# Altium PCB arduino-nano_v2.PcbDoc
Units mm, origin at the board's own origin, x right, y up, seen from the top; angles counter-clockwise.
Board outline 18.29 x 45.21 mm, 4 copper layers (Top Layer, Signal Layer Top, Signal Layer Bottom, Bottom Layer), stack 0.603 mm thick; 25 components, 41 nets, 165 pads, 12 vias.
Unrouted connection lines stored in the file: 70.
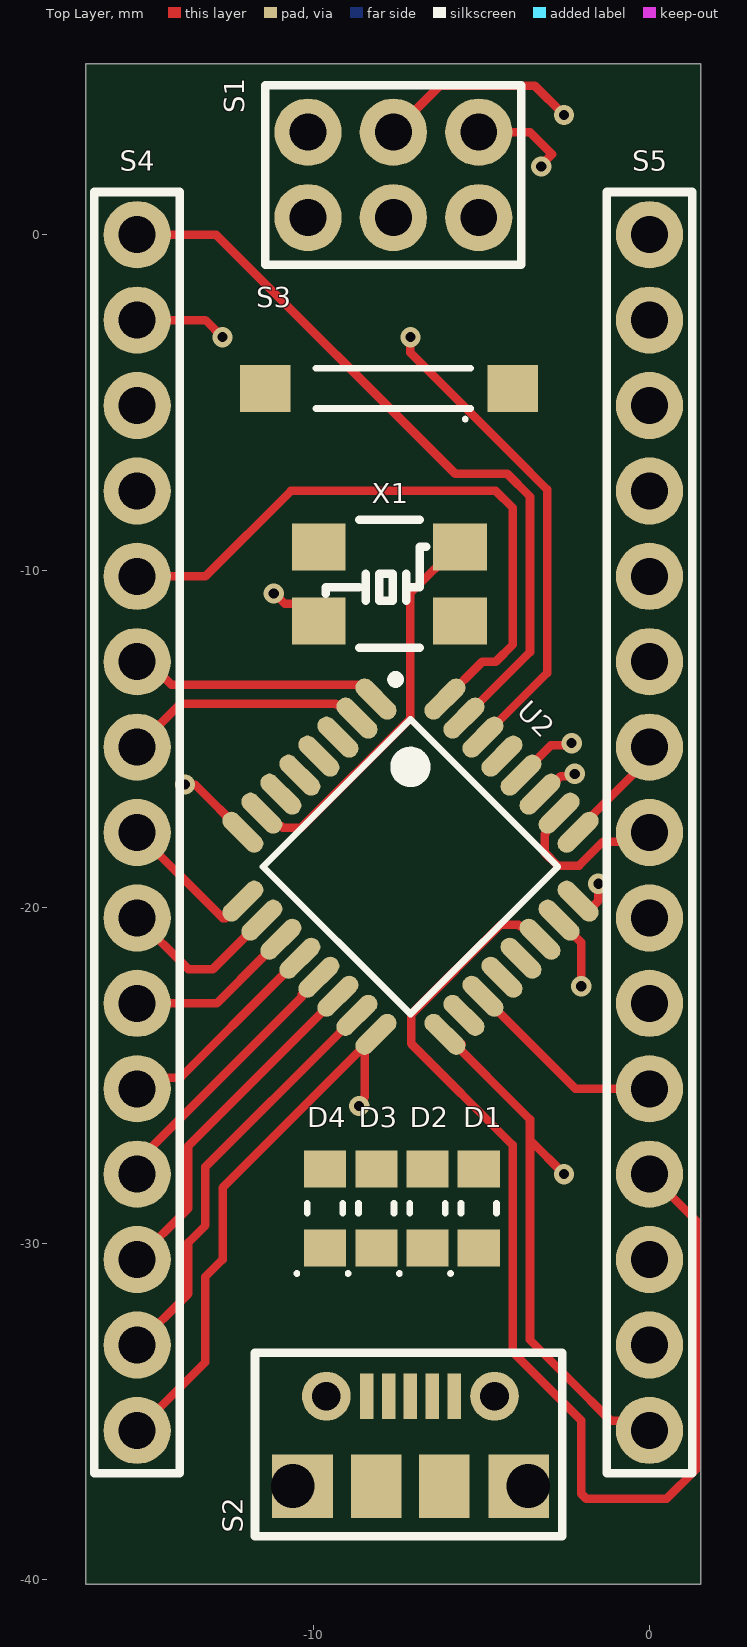
[diagram p0: Top Layer view]
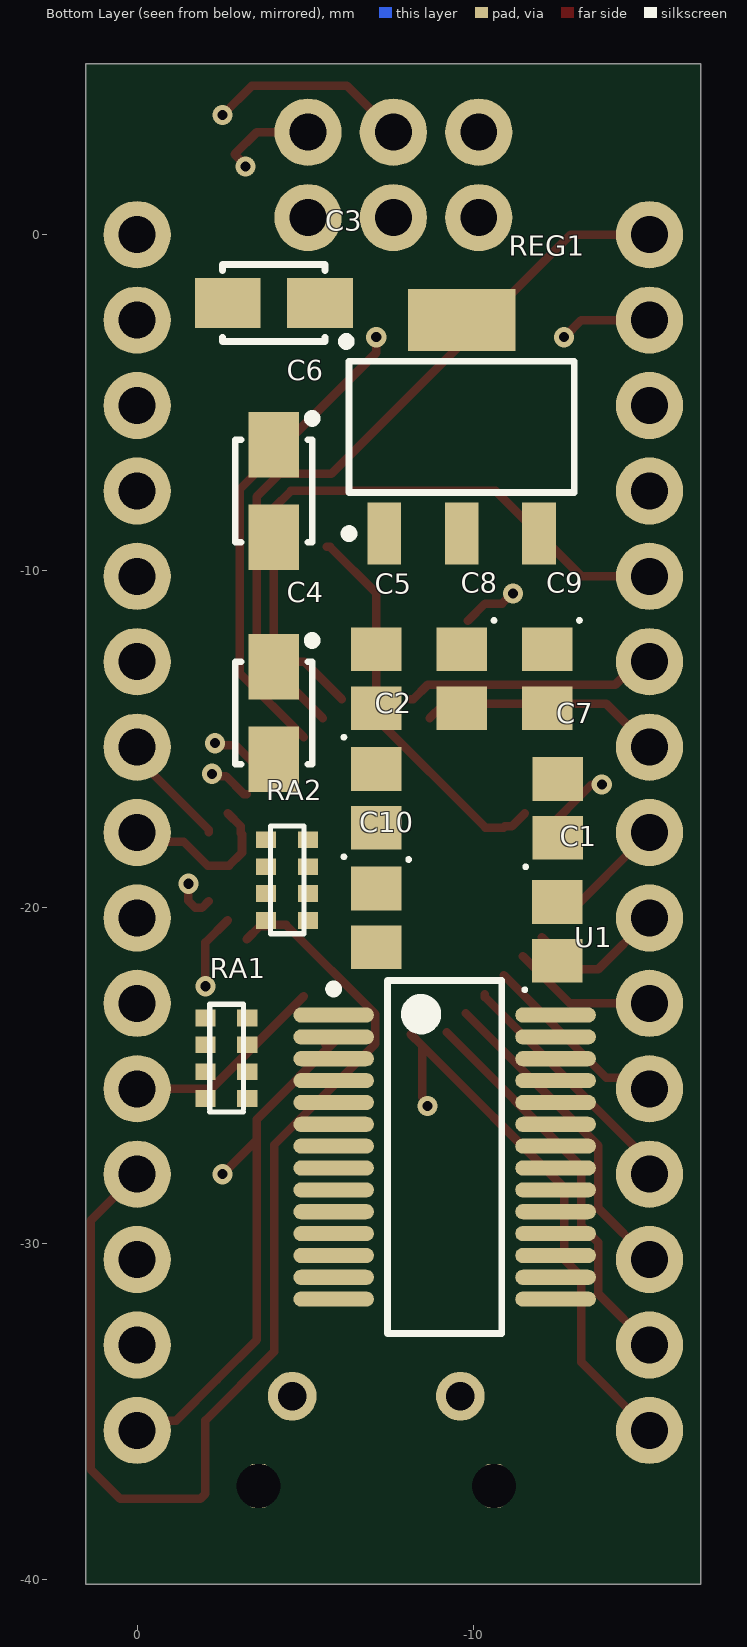
[diagram p1: Bottom Layer view, seen from below]
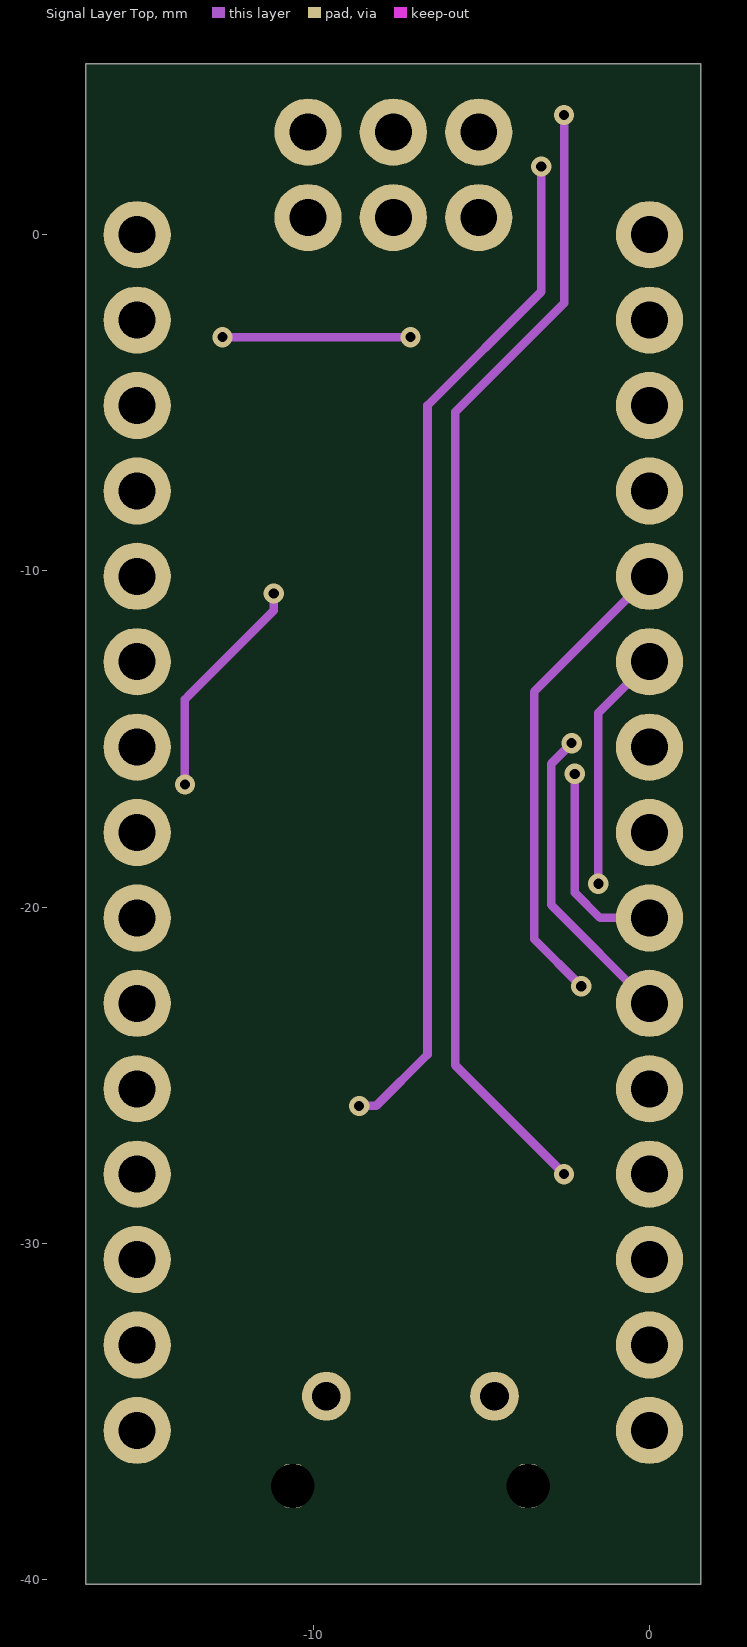
[diagram p2: Signal Layer Top]

## Layer stack, top to bottom
Top Solder: solder mask 0.0102, Solder Resist, Dk 3.5
Top Layer: signal copper 0.0356
Dielectric 2: prepreg 0.0711, PP-006, Dk 4.1
Signal Layer Top: signal copper 0.035
Dielectric 1: dielectric 0.32, FR-4, Dk 4.8
Signal Layer Bottom: signal copper 0.035
Dielectric 3: prepreg 0.0711, PP-006, Dk 4.1
Bottom Layer: signal copper 0.0356
Bottom Solder: solder mask 0.0102, Solder Resist, Dk 3.5

## Board outline
-16.764,-40.132 1.524,-40.132 1.524,5.08 -16.764,5.08

## Design rules (kind name [scope] priority, off if disabled: settings)
Clearance [All] p1: gap=0.254 ignorepadtopadclearanceinfootprint=FALSE except(0: Arc-Hole Track-Hole SMDPad-Hole THPad-Hole Via-Hole Fill-Hole Poly-Hole Region-Hole Text-Hole)
PolygonConnect [All] p1: connectstyle=Relief reliefconductorwidth=0.254 reliefentries=4 polygonreliefangle="90 Angle" airgapwidth=0.254
RoomDefinition arduino-nano [InComponentClass('arduino-nano')] p1: confinementstyle=ConfineIn formatcopy=TRUE lockcomponents=FALSE outline -141.224,-66.04 -90.424,-66.04 -90.424,-40.64 -141.224,-40.64
RoutingVias [All] p1: holewidth=0.3 width=0.3 viastyle="Through Hole" minholewidth=0.3 minwidth=0.6 maxholewidth=0.5 maxwidth=1
SolderMaskExpansion [All] p1: expansion=0.102 istentingtop=FALSE
Width [All] p1: maxlimit=0.254 minlimit=0.254 preferedwidth=0.254
30 further rules are at their usual default settings.

## Components (designator, comment, footprint, x,y, rotation, side; value= is the part's Value field where it differs from the comment)
C1 "100nF Ceramic Multilayer Capacitor_1" CAPCP2012X09N -12.493,-20.718 r90 bottom
C2 "100nF Ceramic Multilayer Capacitor_1" CAPCP2012X09N -7.112,-16.764 r90 bottom
C3 "Capacitor SMT Tantalum" "CASE A - 3216X18" -4.064,-2.032 r0 bottom value=4.7µF
C4 "Capacitor SMT Tantalum" "CASE A - 3216X18" -4.064,-14.224 r270 bottom value=4.7µF
C5 "100nF Ceramic Multilayer Capacitor_1" CAPCP2012X09N -7.112,-13.208 r90 bottom
C6 "Capacitor SMT Tantalum" "CASE A - 3216X18" -4.064,-7.62 r270 bottom value=4.7µF
C7 "100nF Ceramic Multilayer Capacitor_1" CAPCP2012X09N -12.516,-17.063 r90 bottom
C8 "100nF Ceramic Multilayer Capacitor_1" CAPCP2012X09N -9.652,-13.208 r270 bottom
C9 "C0805C180J5GACTU" CAPCP2012X09N -12.192,-13.208 r270 bottom
C10 "C0805C180J5GACTU" CAPCP2012X09N -7.112,-20.32 r270 bottom
D1 "Kingbright Green LED, 70 mcd 120 ° 0805" LED1913X12NGREEN -5.08,-28.956 r90 top
D2 "Kingbright Red LED, 100 mcd 120 ° 0805" LED1913X12NRED -6.604,-28.956 r90 top
D3 "Kingbright Blue LED, 60 mcd 120 ° 0805" LED1913X12NBLUE -8.128,-28.956 r90 top
D4 "Kingbright Orange LED, 200 mcd 120 ° 0805" LED1913X12NYEL/ORANGE -9.652,-28.956 r90 top
RA1 "1k +- 5% SMT Resistor Array" "1206 RA" -3.15,-23.292 r270 bottom
RA2 "1k +- 5% SMT Resistor Array" "1206 RA" -4.953,-17.996 r270 bottom
REG1 "LM1117MP-5.0/NOPB, Low Dropout Voltage Regulator, 1.5A, 5 V ±1%, 4-Pin SOT-223" SOT230P700X180-4N -9.652,-5.715 r90 bottom
S1 "Programming Headers Dual Row" "ISP HEADER" 12.573,-11.049 r180 top
S2 "NewMolex Right Angle SMT Female Type B Micro USB Connector, 30 V ac, 1.8A" MicroUSB -8.342,-34.544 r0 top
S3 "Tactile Switch SPST- NO 0.05A @24V" Button8014X17N -7.62,-4.572 r180 top
S4 "connector;str header;single row;.1 cont centers;.095 tail;gold or gtx;36 contact" Header -15.24,0 r270 top
S5 "connector;str header;single row;.1 cont centers;.095 tail;gold or gtx;36 contact" Header 0,0 r270 top
U1 "FT232RL, Universal Asynchronous Receiver & Transmitter 3MBd, 28-Pin, SSOP" SOP65P780X200-28N -9.144,-27.432 r180 bottom
U2 "ATMEGA328P-AU" TQFP80P900X900X120-32N -7.112,-18.796 r315 top
X1 "Aker 16MHz Crystal SMT" "Aker S5C Crystal" -5.636,-9.284 r0 top value=16MHz

## Footprints (in the part's own frame and the unit in brackets; to place one, negate y for a bottom-side part, rotate by r counter-clockwise, add the part's x,y. Pads: shape width x height; smd on the part's side, far side on the other; paste and mask are expansions set on the pad)
"1206 RA" [mm]
  rect 0.5x0.6 smd: 1(0,0.127) 2(0.8,0.127) 3(1.6,0.127) 4(2.4,0.127) 5(0,-1.118) 6(0.8,-1.118) 7(1.6,-1.118) 8(2.4,-1.118)
  silkscreen extent -0.41,-0.99 2.79,0.01, body extent -0.41,-1.31 2.79,0.29, height 0.5
"Aker S5C Crystal" [mm]
  rect 1.6x1.4 smd: 1(0,0) 2(-4.2,0) 3(0,-2.2) 4(-4.2,-2.2)
  round 0.254 on Top Overlay: 5(-3,-2.4)
  silkscreen extent -4,-3 -1,0.8, body extent -4.7,-2.8 0.5,0.6, height 1
Button8014X17N [mm] "Chip Inductor, 2-Leads, Body 8.00x1.40mm, IPC Medium Density"
  rect 1.5x1.4 smd: 1(-3.556,0) 2(3.81,0)
  silkscreen extent -2.3,-0.6 2.3,0.96, body extent -3.79,-1.92 4.21,1.78, height 2.5
CAPCP2012X09N [mm] "Chip Capacitor, 2-Leads, Body 2.00x1.25mm, IPC Medium Density"
  rect 1.3x1.5 smd: 1(-0.875,0) 2(0.875,0)
  silkscreen extent -1.79,0.91 -1.69,1.01, body extent -1.05,-0.57 0.95,0.68, height 0.78
"CASE A - 3216X18" [mm] "Molded Capacitor, 2-Leads, Body 3.2x1.6mm, IPC Medium Density"
  rect 1.95x1.5 smd: 1(-1.375,0) 2(1.375,0)
  silkscreen extent -2.28,-1.14 1.52,1.27, body extent -1.52,-0.76 1.65,0.84, height 1.77
Header [mm] "SIL Header"
  round 2 hole 1.1: 1(0,0) 2(2.54,0) 3(5.08,0) 4(7.62,0) 5(10.16,0) 6(12.7,0) 7(15.24,0) 8(17.78,0) 9(20.32,0) 10(22.86,0) 11(25.4,0) 12(27.94,0) 13(30.48,0) 14(33.02,0) 15(35.56,0)
  silkscreen extent -1.27,-1.27 36.83,1.27, body extent -1.33,-1.35 36.93,1.35, height 8.6
"ISP HEADER" [mm] "SIL Header for programming"
  round 2 hole 1.1: 1(17.653,-14.097) 2(17.653,-11.557) 3(20.193,-14.097) 4(20.193,-11.557) 5(22.733,-14.097) 6(22.733,-11.557)
  silkscreen extent 16.38,-15.49 24,-10.16, body extent 16.38,-15.37 24,-10.29, height 8
LED1913X12NBLUE [mm] "LED 2-Leads, Body 1.90x1.32mm, IPC Medium Density"
  rect 1.1x1.25 smd: 1(-1.175,0) 2(1.175,0)
  silkscreen extent -1.99,-0.53 0.15,0.89, body extent -1,-0.62 1.02,0.62, height 1.1
LED1913X12NGREEN [mm] "LED 2-Leads, Body 1.90x1.32mm, IPC Medium Density"
  rect 1.1x1.25 smd: 1(-1.175,0) 2(1.175,0)
  silkscreen extent -1.99,-0.53 0.15,0.89, body extent -1.01,-0.62 1.01,0.63, height 1.1
LED1913X12NRED [mm] "LED 2-Leads, Body 1.90x1.32mm, IPC Medium Density"
  rect 1.1x1.25 smd: 1(-1.175,0) 2(1.175,0)
  silkscreen extent -1.99,-0.53 0.15,0.89, body extent -1.02,-0.43 1.04,0.47, height 0.85
LED1913X12NYEL/ORANGE [mm] "LED 2-Leads, Body 1.90x1.32mm, IPC Medium Density"
  rect 1.1x1.25 smd: 1(-1.175,0) 2(1.175,0)
  silkscreen extent -1.99,-0.53 0.15,0.89, body extent -1.01,-0.62 1.01,0.63, height 1.1
MicroUSB [mm] "MicroUSB  Molex 5Pin"
  rect 0.4x1.35 smd: 1(-0.07,0) 2(0.58,0) 3(1.23,0) 4(1.88,0) 5(2.53,0)
  rrect50% 0.6x1.3 hole 1.3: ""(-2.27,-2.667) ""(-2.27,-2.667) ""(4.73,-2.667)
  rect 1.8x1.9 smd: ""(-1.98,-2.678) ""(4.45,-2.678)
  round 1.45 hole 0.85: ""(-1.27,0) ""(3.73,0)
  rect 1.5x1.9 smd: ""(0.218,-2.678) ""(2.242,-2.678)
  silkscreen extent -3.39,-4.17 5.75,1.3, body extent -2.83,-5.32 5.37,0.11, height 2.68
SOP65P780X200-28N [mm] "SOP, 28-Leads, Body 10.20x5.30mm, Pitch 0.65mm, IPC Medium Density"
  oval 2.4x0.45 smd: 1(-3.3,4.225) 2(-3.3,3.575) 3(-3.3,2.925) 4(-3.3,2.275) 5(-3.3,1.625) 6(-3.3,0.975) 7(-3.3,0.325) 8(-3.3,-0.325) 9(-3.3,-0.975) 10(-3.3,-1.625) 11(-3.3,-2.275) 12(-3.3,-2.925) 13(-3.3,-3.575) 14(-3.3,-4.225) 15(3.3,-4.225) 16(3.3,-3.575) 17(3.3,-2.925) 18(3.3,-2.275) 19(3.3,-1.625) 20(3.3,-0.975) 21(3.3,-0.325) 22(3.3,0.325) 23(3.3,0.975) 24(3.3,1.625) 25(3.3,2.275) 26(3.3,2.925) 27(3.3,3.575) 28(3.3,4.225)
  silkscreen extent -3.43,-5.25 1.7,5.25, body extent -3.91,-5.1 3.91,5.1, height 2
SOT230P700X180-4N [mm] "SOT223, 4-Leads, Body 6.50x7.00mm (avg), Pitch 2.30mm, IPC Medium Density"
  rect 1.85x1 smd: 1(-3.175,2.3) 2(-3.175,0) 3(-3.175,-2.3)
  rect 1.85x3.2 smd: 4(3.175,0)
  silkscreen extent -3.3,-3.35 1.95,3.48, body extent -3.8,-3.12 3.29,3.38, height 1.65
TQFP80P900X900X120-32N [mm] "TQFP, 32-Leads, Body 7.00x7.00mm, Pitch 0.80mm, IPC Medium Density"
  oval 1.5x0.55 smd: 1(-4.25,2.8) 2(-4.25,2) 3(-4.25,1.2) 4(-4.25,0.4) 5(-4.25,-0.4) 6(-4.25,-1.2) 7(-4.25,-2) 8(-4.25,-2.8) 17(4.25,-2.8) 18(4.25,-2) 19(4.25,-1.2) 20(4.25,-0.4) 21(4.25,0.4) 22(4.25,1.2) 23(4.25,2) 24(4.25,2.8)
  oval 0.55x1.5 smd: 9(-2.8,-4.25) 10(-2,-4.25) 11(-1.2,-4.25) 12(-0.4,-4.25) 13(0.4,-4.25) 14(1.2,-4.25) 15(2,-4.25) 16(2.8,-4.25) 25(2.8,4.25) 26(2,4.25) 27(1.2,4.25) 28(0.4,4.25) 29(-0.4,4.25) 30(-1.2,4.25) 31(-2,4.25) 32(-2.8,4.25)
  silkscreen extent -4.37,-3.1 3.1,3.75, body extent -4.43,-4.5 4.57,4.5, height 1.6

## Part data
C1 C2 C5 C7 C8: "AVX 0805 Standard 100nF Ceramic Multilayer Capacitor, 50 V dc X7R Dielectric ±10% SMD", Capacitance=100nF, Manufacturer=AVX, Package=0805, Voltage=50V, Creator="Ritesh Kanjee", Datasheet URL=http://za.rs-online.com/web/p/ceramic-multilayer-capacitors/4646688/, Date Created="18 February 2015", RS Stock No.=464-6688
C3 C4 C6: library part "4.7µF Tant RS 496-3545", "Capacitor,tantalum,SMT,16V,4.7uF,10%,A-case", Package=3216-18, Tolerance=10%, Voltage=16V, ComponentLink1Description="Supplier Website", ComponentLink1URL=http://za.rs-online.com/web/search/searchBrowseAction.html?method=getProduct&R=4963545, ComponentLink2Description="RS Data sheet", ComponentLink2URL=http://docs-europe.origin.electrocomponents.com/webdocs/04ed/0900766b804ed4cc.pdf, LatestRevisionDate=28-April-2010, Part Originator="H Theron", Publisher=DPSS, RS Stock Nr.=496-3545
C9 C10: library part "18pF Ceramic Multilayer Capacitor, 50 V dc C0G Dielectric ±5% SMD", "18pF Ceramic Multilayer Capacitor, 50 V dc C0G Dielectric ±5% SMD", Capacitance=18pF, Manufacturer=Kemet, Package=0805, Voltage=50V, Creator="Ritesh Kanjee", Datasheet URL=http://za.rs-online.com/web/p/ceramic-multilayer-capacitors/6480935/?searchTerm=C0805C180J5GACTU&relevancy-data=636F3D3226696E3D4931384E4B6E6F776E41734D504E266C753D656E266D6D3D6D61746368616C6C7061727469616C26706D3D5E5B5C707B4C7D5C707B4E647D2D2C2F255C2E5D2B2426706F3D313326736E3D592673743D4D414E5F504152545F4E554D4245522677633D424F5448267573743D4330383035433138304A35474143545526, Date Created="18 February 2015", RS Stock No.=648-0935
D1: Color=Green, Forward Voltage="2.1 V", Manufacturer=KingBright, Manufacturer Part No.=KP-2012MGC, Creator="Ritesh Kanjee", Datasheet URL=http://za.rs-online.com/web/p/visible-leds/4663778/, Date Created="18 February 2015", RS Stock No.=466-3778
D2: Color=RED, Forward Voltage=1.85V, Manufacturer=KingBright, Manufacturer Part No.=KP-2012SRC-PRV, Creator="Ritesh Kanjee", Datasheet URL=http://za.rs-online.com/web/p/visible-leds/4663813/, Date Created="18 February 2015", RS Stock No.=466-3813
D3: Color=Blue, Forward Voltage=3.2V, Manufacturer=KingBright, Manufacturer Part No.=KP-2012PBC-A, Creator="Ritesh Kanjee", Datasheet URL=http://za.rs-online.com/web/p/visible-leds/4663784/, Date Created="18 February 2015", RS Stock No.=466-3784
D4: Color=Orange, Forward Voltage=1.85V, Manufacturer=KingBright, Manufacturer Part No.=KP-2012SEC, Creator="Ritesh Kanjee", Datasheet URL=http://za.rs-online.com/web/p/visible-leds/4663790/, Date Created="18 February 2015", RS Stock No.=466-3790
RA1 RA2: "1k +- 5% SMT Resistor Array 4 Res", Manufacturer=Bourns, Manufacturer Part No.=CAY16-102J4LF, Creator="R Kanjee", Date Created="25 February 2015", RS Stock No.=552-5579, Wattage=0.25W
REG1: library part LM1117MP-5.0, Manufacturer="Texas Instruments", Maximum Input Voltage=15V, Output Voltage=5V, Supply Current=1.5Amps, Created By="R Kanjee", Datasheet URL=http://za.rs-online.com/web/p/low-dropout-voltage-regulators/5339583/, Date Created="26 February 2015", RS Stock No.=533-9583
S1: library part "Programming ISP, Programming Headers Dual Row", Current Rating="3Amps Continuous", Manufacturer=FCI, Manufacturer Part No.=68000-236HLF, Created By="R Kanjee", Date Created="1 March 2015", RS Stock No.=2509565626
S2: library part "Micro USB Connector, 30 V ac, 1.8A", Manufacturer=Molex, Manufacturer Part No.=105017-0001, Max Current=1.8A, Max Voltage=30V, Creator="R Kanjee", Datasheet URL=http://za.rs-online.com/web/p/micro-usb-connectors/8486764/, Date Created="28 February 2015", RS Stock No=848-6764
S3: Manufacturer=Omron, Manufacturer Part No.=B3F1000, Creator="R Kanjee", Date Created="25 February 2015", RS Stock No.=686-6847, State="Normaly Open"
S4 S5: library part "Single row; PCB headers", Current Rating="3Amps Continuous", Manufacturer=FCI, Manufacturer Part No.=68000-236HLF, Created By="R Kanjee", Date Created="1 March 2015", RS Stock No.=2509565626
U1: library part "FT232RL USB to UART, Universal Asynchronous Receiver & Transmitter 3MBd, 28-Pin, SSOP", Manufacturer="FTDI Chip", Manufacturer Part No.=FT232RL, Creator="R Kanjee", Date Created="03 March 2015", Pin Count=28, RS Stock No.=406-580
U2: "Microchip ATMEGA328P-AU, 8bit AVR Microcontroller, 20MHz, 1 kB, 32 kB Flash, 32-Pin TQFP", Company=ComputeChip, Created By="Rajiv Bishwokarma", Datasheet URL=https://docs.rs-online.com/5775/0900766b80db4deb.pdf, Date Created="December 31, 2020", RS Stock No.=696-3092
X1: library part "Aker  C5S-16.000-12-3030-X", "Aker S5C SMT Crystal", Frequency Stability=+/-30ppm, Load Capacitance=12pF, Manufacturer=Aker, Manufacturer Part #=C5S-16.000-12-3030-X, Package="3.2x5mm SMD", Creator="R Kanjee", HelpURL=http://za.rs-online.com/web/p/crystal-units/6719488/, RS="RS 671-9488", RS Stock Nr.=671-9488, Supplier=RS

## Via types
v1: diameter 0.6, hole 0.3, Top Layer to Bottom Layer, 12 vias

## Nets (pads, with @x,y where several pads share a name; then routed paths per layer and width w, separated by ;. In a path a pad name is that pad's centre, name@x,y a point inside that pad or via, vN(x,y) a via of type N, cw(c..) or ccw(c..) an arc to the next point about the centre after c; other vN are vias at no path point)
3V3: C2.2 S5.14 U1.17
5V: C3.1 C4.1 C5.2 D1.1 D2.1 RA1.4 RA2.5 REG1.2 S1.2 S5.4 U1.4 U1.20 U2.4 U2.6 U2.18
A0: S5.5 U2.23 | length 16.4
  Top Layer w0.254: U2.23 -2.032,-21.048 v1(-2.032,-22.352)
  Signal Layer Top w0.254: v1(-2.032,-22.352) -3.435,-20.949 -3.435,-13.595 S5.5
A1: S5.6 U2.24 | length 8.5
  Top Layer w0.254: U2.24 -1.927,-20.021 -1.733,-20.021 -1.524,-19.812 v1(-1.524,-19.304)
  Signal Layer Top w0.254: v1(-1.524,-19.304) -1.524,-14.224 S5.6
A2: S5.7 U2.25 | length 3.4
  Top Layer w0.254: U2.25 -2.127,-17.691 0,-15.564 S5.7
A3: S5.8 U2.26 | length 5
  Top Layer w0.254: U2.26 -3.085,-17.598 -3.085,-17.801 -3.119,-17.835 -3.119,-18.378 -2.734,-18.763 -2.095,-18.763 -1.381,-18.049 -0.269,-18.049 S5.8
A4: S5.9 U2.27 | length 7.4
  Top Layer w0.254: U2.27 -3.178,-16.639 -2.639,-16.1 -2.291,-16.1 v1(-2.225,-16.034)
  Signal Layer Top w0.254: v1(-2.225,-16.034) -2.225,-19.566 -1.471,-20.32 S5.9
A5: S5.10 U2.28 | length 11.1
  Top Layer w0.254: U2.28 -2.939,-15.188 -2.383,-15.188 v1(-2.317,-15.122)
  Signal Layer Top w0.254: v1(-2.317,-15.122) -2.927,-15.732 -2.927,-19.933 S5.10
A6: S5.11 U2.19 | length 6.1
  Top Layer w0.254: U2.19 -2.205,-25.4 S5.11
A7: S5.12 U2.22 | length 34.6
  Top Layer w0.254: U2.22 -3.651,-20.56 -3.854,-20.56 -3.888,-20.526 -4.432,-20.526 -7.087,-23.182 -7.087,-24.06 -4.074,-27.073 -4.074,-33.22 -2.032,-35.262 -2.032,-37.443 -1.883,-37.592 0.508,-37.592 1.381,-36.719 1.381,-29.321 S5.12
AREF: C8.1 S5.13 U2.20
D0/RX: RA2.3 S4.2 U2.30 | length 22.7
  Top Layer w0.254: S4.2 -13.208,-2.54 v1(-12.7,-3.048) ; v1(-7.112,-3.048) -7.112,-3.513 -4.021,-6.604 -3.048,-7.577 -3.048,-13.035 U2.30
  Signal Layer Top w0.254: v1(-12.7,-3.048) v1(-7.112,-3.048)
D1/TX: RA2.2 S4.1 U2.31 | length 22.3
  Top Layer w0.254: S4.1 -12.892,0 -5.78,-7.112 -4.231,-7.112 -3.556,-7.787 -3.556,-12.412 U2.31
D2: S4.5 U2.32 | length 19.2
  Top Layer w0.254: S4.5 -13.208,-10.16 -10.668,-7.62 -4.572,-7.62 -4.064,-8.128 -4.064,-12.192 -4.572,-12.7 -4.976,-12.7 U2.32
D3: S4.6 U2.1 | length 7.6
  Top Layer w0.254: S4.6 -14.903,-12.7 -14.218,-13.385 -8.644,-13.385 -8.217,-13.811 U2.1
D4: S4.7 U2.2 | length 7.2
  Top Layer w0.254: S4.7 -13.95,-13.95 -9.333,-13.95 -9.299,-13.984 -9.096,-13.984 U2.2
D5: S4.8 U2.9 | length 3.7
  Top Layer w0.254: S4.8@-15.189,-17.78 S4.8 -12.691,-20.329 U2.9@-12.605,-20.329
D6: S4.9 U2.10 | length 4.7
  Top Layer w0.254: S4.9@-14.768,-20.32 S4.9 -13.716,-21.844 -12.988,-21.844 U2.10@-12.039,-20.895
D7: S4.10 U2.11 | length 4.3
  Top Layer w0.254: S4.10 -12.873,-22.86 U2.11@-11.474,-21.461
D8: S4.11 U2.12 | length 5.7
  Top Layer w0.254: S4.11 -14.906,-25.066 -13.948,-25.066 U2.12@-10.908,-22.026
D9: S4.12 U2.13 | length 7.4
  Top Layer w0.254: S4.12 -15.24,-27.57 -10.342,-22.672 U2.13@-10.342,-22.592
D10: S4.13 U2.14 | length 9.6
  Top Layer w0.254: S4.13 -13.716,-28.956 -13.716,-27.097 U2.14@-9.777,-23.158
D11/MOSI: S1.4 S4.14 U2.15 | length 11.8
  Top Layer w0.254: S4.14 -13.716,-31.496 -13.716,-29.972 -13.208,-29.464 -13.208,-27.72 U2.15@-9.211,-23.723
D12/MISO: S1.1 S4.15 U2.16 | length 50
  Top Layer w0.254: S4.15 -13.208,-33.528 -13.208,-30.988 -12.7,-30.48 -12.7,-28.344 U2.16@-8.473,-24.117 ; v1(-8.636,-25.908) -8.636,-25.814 -8.473,-25.652 U2.16@-8.473,-24.117 ; U2.16 U2.16@-8.473,-24.117 ; S1.1 -3.556,3.048 -2.899,2.391 -3.221,2.069 v1(-3.221,2.032)
  Signal Layer Top w0.254: v1(-8.636,-25.908) -8.128,-25.908 -6.604,-24.384 -6.604,-5.08 -3.221,-1.697 v1(-3.221,2.032)
D13/SCK: RA1.1 S1.3 S5.15 U2.17 | length 56.6
  Top Layer w0.254: S1.3 -6.239,4.429 -3.413,4.429 v1(-2.54,3.556) ; U2.17 -3.556,-26.312 -3.556,-26.924 ; U2.17@-5.688,-23.976 U2.17@-5.588,-24.076 ; v1(-2.54,-27.94) -3.556,-26.924 ; S5.15 -0.289,-35.271 -1.156,-35.271 -2.379,-34.049 -3.556,-32.871 -3.556,-26.924
  Signal Layer Top w0.254: v1(-2.54,-27.94) -5.78,-24.7 -5.78,-5.272 -2.54,-2.032 v1(-2.54,3.556)
GND: C2.1 C3.2 C4.2 C5.1 C6.2 C7.1 C8.2 C9.2 C10.2 D3.2 D4.2 REG1.3 S1.6 S2.5 S3.1 S4.4 S5.2 U1.7 U1.18 U1.21 U1.25 U2.3 U2.5 U2.21 X1.2 X1.3
GREEN_TX: RA1.3 U1.22
NetC1_2: C1.2 U1.2
NetC9_1: C9.1 U2.7 X1.1 | length 11.7
  Top Layer w0.254: U2.7 -11.139,-17.598 -10.935,-17.598 -10.902,-17.631 -10.358,-17.631 -7.112,-14.385 -7.112,-10.66 -5.736,-9.284 X1.1
NetC10_1: C10.1 U2.8 X1.4 | length 10.8
  Top Layer w0.254: v1(-13.82,-16.352) -13.516,-16.352 U2.8 ; v1(-11.176,-10.668) -11.158,-10.668 -10.854,-10.971 -10.349,-10.971 X1.4
  Signal Layer Top w0.254: v1(-13.82,-16.352) -13.82,-13.82 -13.668,-13.668 -11.176,-11.176 v1(-11.176,-10.668)
NetD1_2: D1.2 RA1.7
NetD2_2: D2.2 RA1.6
NetD3_1: D3.1 RA1.8
NetD4_1: D4.1 RA1.5
NetS2_2: S2.2 U1.16
NetS2_3: S2.3 U1.15
RED_RX: RA1.2 U1.23
RESET: C1.1 RA2.1 S1.5 S3.2 S4.3 S5.3 U2.29
RX: RA2.7 U1.1
TX: RA2.6 U1.5
VUSB: C6.1 C7.2 REG1.1 S2.1 S5.1
pads on no net: RA2.4 RA2.8 REG1.4 S2. S2.4 U1.3 U1.6 U1.8 U1.9 U1.10 U1.11 U1.12 U1.13 U1.14 U1.19 U1.24 U1.26 U1.27 U1.28 X1.5

## Silkscreen, mask and mechanical layers (free items; w line width, h text height)
Mechanical 1:
  the board outline again, w0.152